# Altium PCB PCB.PcbDoc
Units mm, origin at the board's own origin, x right, y up, seen from the top; angles counter-clockwise.
Board outline 18.92 x 13.97 mm, 2 copper layers (Top Layer, Bottom Layer); 34 components, 22 nets, 94 pads, 27 vias.
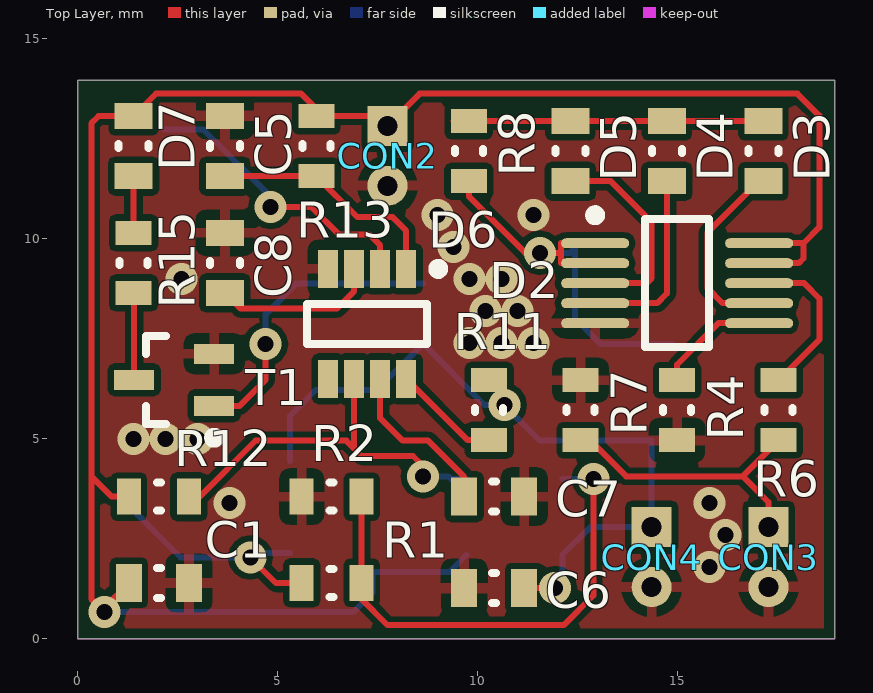
[diagram p0: Top Layer view]
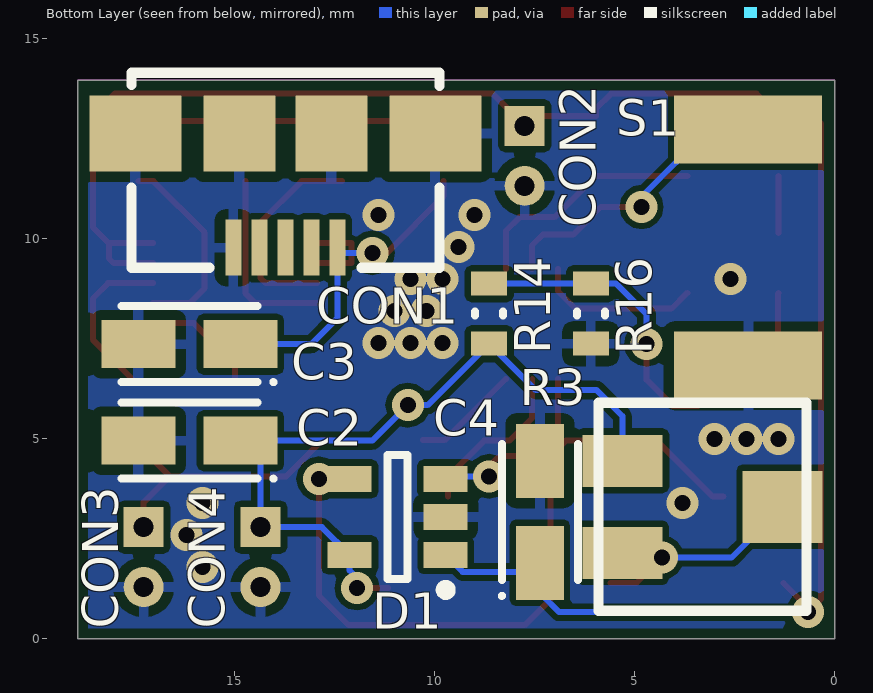
[diagram p1: Bottom Layer view, seen from below]

## Layer stack, top to bottom
Top Solder: solder mask 0.0102, Solder Resist, Dk 3.5
Top Layer: signal copper 0.0356
Dielectric 1: dielectric 0.32, FR-4, Dk 4.8
Bottom Layer: signal copper 0.0356
Bottom Solder: solder mask 0.0102, Solder Resist, Dk 3.5

## Board outline
0,0 18.923,0 18.923,13.97 0,13.97

## Design rules (kind name [scope] priority, off if disabled: settings)
Clearance Clearance_1 [OnLayer('Keep-Out Layer')] p1: gap=0.26 ignorepadtopadclearanceinfootprint=FALSE except(0: Arc-Hole Track-Hole SMDPad-Hole THPad-Hole Via-Hole Fill-Hole Poly-Hole Region-Hole Text-Hole)
Clearance MyClearance [All] p2: gap=0.15 ignorepadtopadclearanceinfootprint=FALSE except(0: Arc-Hole Track-Hole SMDPad-Hole THPad-Hole Via-Hole Fill-Hole Poly-Hole Region-Hole Text-Hole)
Clearance [All] p3: gap=0.254 ignorepadtopadclearanceinfootprint=FALSE except(0: Arc-Hole Track-Hole SMDPad-Hole THPad-Hole Via-Hole Fill-Hole Poly-Hole Region-Hole Text-Hole)
PlaneConnect [All] p1: planeconnectstyle=Direct reliefexpansion=0.508 reliefentries=4 reliefconductorwidth=0.254 reliefairgap=0.254
PolygonConnect PolygonConnect_2 [All vs IsNamedPolygon('Top Layer-GND')] p1: thpad.connectstyle=Relief thpad.reliefconductorwidth=0.254 thpad.reliefentries=4 thpad.polygonreliefangle="90 Angle" thpad.airgapwidth=0.254 smdpad.connectstyle=Relief smdpad.reliefconductorwidth=0.254 smdpad.reliefentries=4 smdpad.polygonreliefangle="90 Angle" smdpad.airgapwidth=0.254 via.connectstyle=Direct via.reliefconductorwidth=0.254 via.reliefentries=4 via.polygonreliefangle="90 Angle" via.airgapwidth=0.254
PolygonConnect PolygonConnect_1 [All vs IsNamedPolygon('Bottom Layer-GND')] p2: thpad.connectstyle=Relief thpad.reliefconductorwidth=0.254 thpad.reliefentries=4 thpad.polygonreliefangle="90 Angle" thpad.airgapwidth=0.254 smdpad.connectstyle=Relief smdpad.reliefconductorwidth=0.254 smdpad.reliefentries=4 smdpad.polygonreliefangle="90 Angle" smdpad.airgapwidth=0.254 via.connectstyle=Direct via.reliefconductorwidth=0.254 via.reliefentries=4 via.polygonreliefangle="90 Angle" via.airgapwidth=0.254
PolygonConnect [All] p3: connectstyle=Relief reliefconductorwidth=0.254 reliefentries=4 polygonreliefangle="90 Angle" airgapwidth=0.254
RoomDefinition Schematic [InComponentClass('Schematic')] p1: confinementstyle=ConfineIn formatcopy=TRUE lockcomponents=FALSE outline 0,0 18.923,0 18.923,13.97 0,13.97
RoutingVias [All] p1: holewidth=0.4 width=0.8 viastyle="Through Hole" minholewidth=0.4 minwidth=0.8 maxholewidth=0.4 maxwidth=0.8
SolderMaskExpansion MyViaSolderMaskExpansion [IsVia] p1: expansion=0 soldermaskfromhole=TRUE
SolderMaskExpansion [All] p2: expansion=0.102
Width [All] p1: maxlimit=0.15 minlimit=0.15 preferedwidth=0.15
29 further rules are at their usual default settings.

## Classes and differential pairs
net class NotGND: +3.7V NetC2_1 NetC3_1 NetC5_1 NetC7_1 NetC8_1 NetCON3_1 NetD1_3 NetD1_4 NetD2_3 NetD2_4 NetD2_6 NetD2_7 NetD2_8 NetD6_2 NetD6_8 NetD7_2 NetR1_2 NetR14_2 NetR15_1

## Components (designator, comment, footprint, x,y, rotation, side; value= is the part's Value field where it differs from the comment)
C1 "Capasitor" CAPC1608X05N 2.032,1.397 r0 top
C2 "Capasitor_POL" CAPMP3216X18N 16.129,4.953 r0 bottom
C3 "Capasitor_POL" CAPMP3216X18N 16.129,7.366 r0 bottom
C4 "Capasitor_POL" CAPMP3216X18N 7.366,3.175 r90 bottom
C5 "Capasitor" CAPC1608X05N 3.683,12.319 r90 top
C6 "Capasitor" CAPC1608X05N 10.414,1.27 r180 top
C7 "Capasitor" CAPC1608X05N 10.414,3.556 r0 top
C8 "Capasitor" CAPC1608X05N 3.683,9.398 r90 top
CON1 "CON?" MicroUSB 13.731,9.079 r0 bottom
CON2 "CON?" HDR1X2_no_body 7.747,12.827 r270 top
CON3 "CON?" HDR1X2_no_body 17.272,2.794 r270 top
CON4 "CON?" HDR1X2_no_body 14.351,2.794 r270 top
D1 "D?" SOT23-5AN 10.922,3.048 r0 bottom
D2 "MCP73833/4" TSSOP50P490-10AN 14.986,8.89 r0 top
D3 "LED" CD1608-0603 17.145,12.192 r270 top
D4 "LED" CD1608-0603 14.732,12.192 r270 top
D5 "LED" CD1608-0603 12.319,12.192 r270 top
D6 "D?" TSOP65P280X100-8N 7.239,7.874 r270 top
D7 "LED" CD1608-0603 1.397,12.319 r270 top
R1 "R?" RESC1608X04N 6.35,1.397 r180 top
R2 "R?" RESC1608X04N 6.35,3.556 r180 top
R3 "R?" TSM4ZJ 3.302,3.302 r270 bottom
R4 "R?" RESC1608X04N 14.986,5.715 r270 top
R6 "R?" RESC1608X04N 17.526,5.715 r270 top
R7 "R?" RESC1608X04N 12.573,5.715 r90 top
R8 "R?" RESC1608X04N 9.779,12.192 r90 top
R11 "R?" RESC1608X04N 10.287,5.715 r90 top
R12 "R?" RESC1608X04N 2.032,3.556 r0 top
R13 "R?" RESC1608X04N 5.969,12.319 r270 top
R14 "R?" RESC1608X04N 8.636,8.128 r90 bottom
R15 "R?" RESC1608X04N 1.397,9.398 r90 top
R16 "R?" RESC1608X04N 6.096,8.128 r270 bottom
S1 "S?" KSS241 2.159,9.779 r90 bottom
T1 "BC817-25" SOT323-3AM 2.413,6.477 r180 top

## Footprints (in the part's own frame and the unit in brackets; to place one, negate y for a bottom-side part, rotate by r counter-clockwise, add the part's x,y. Pads: shape width x height; smd on the part's side, far side on the other; paste and mask are expansions set on the pad)
CAPC1608X05N [mm] "Chip Capacitor, 2-Leads, Body 1.60x0.80mm, IPC Medium Density"
  rect 0.65x0.95 smd: 1(-0.75,0) 2(0.75,0)
  silkscreen extent -0.05,-0.38 0.05,0.38, body extent -0.85,-0.45 0.85,0.45, height 0.5
CAPMP3216X18N [mm] "Molded Capacitor, 2-Leads, Body 3.20x1.60mm, IPC Medium Density"
  rect 1.85x1.2 smd: 1(-1.275,0) 2(1.275,0)
  silkscreen extent -2.15,-0.95 1.7,1, body extent -1.7,-0.9 1.7,0.9, height 1.8
CD1608-0603 [mm]
  rect 0.65x0.95 smd: 1(-0.75,0) 2(0.75,0)
  silkscreen extent -0.05,-0.38 0.05,0.38, body extent -0.8,-0.4 0.8,0.4, height 0.59
HDR1X2_no_body [mm] "No body HDR1X2"
  rect 1x1 hole 0.5: 1(0,0)
  round 1 hole 0.5: 2(1.5,0)
KSS241 [mm] "Subminiature SMT Side Actuated"
  rect 1.7x3.7 smd: 1(-2.95,0) 2(2.95,0)
  body extent -2.95,-2.65 2.95,1.95, height 1.7
MicroUSB [mm] "AMPHENOL FCI  10104111-0001LF, Micro USB type AB, USB 2.0"
  rect 0.4x1.4 smd: 1(-1.3,-0.7) 2(-0.65,-0.7) 3(0,-0.7) 4(0.65,-0.7) 5(1.3,-0.7)
  rect 2.3x1.9 smd: 5(-3.75,-3.55) 5(3.75,-3.55)
  rect 1.8x1.9 smd: 5(-1.15,-3.55) 5(1.15,-3.55)
  silkscreen extent -3.85,-5.08 3.85,-0.2, body extent -3.7,-4.88 3.7,-0.35, height 3.07
RESC1608X04N [mm] "Chip Resistor, 2-Leads, Body 1.60x0.80mm, IPC Medium Density"
  rect 0.6x0.9 smd: 1(-0.75,0) 2(0.75,0)
  silkscreen extent -0.05,-0.35 0.05,0.35, body extent -0.85,-0.45 0.85,0.45, height 0.4
SOT23-5AN [mm]
  rect 1.1x0.65 smd: 1(-1.2,0.95) 2(-1.2,0) 3(-1.2,-0.95) 4(1.2,-0.95) 5(1.2,0.95)
  silkscreen extent -1.32,-1.55 0.25,1.95, body extent -1.5,-1.52 1.5,1.53, height 1.55
SOT323-3AM [mm] "SOT323, 3-Leads, Body 2.0x1.3mm, Pitch 0.65mm, Lead Span 2.1mm, IPC Low Density"
  rect 1x0.5 smd: 1(-1,0.65) 2(-1,-0.65) 3(1,0)
  silkscreen extent -1.13,-1.1 0.7,1.57, body extent -1.1,-1 1,1, height 1.07
TSM4ZJ [mm] "5 mm Square Surface Mount Miniature Trimmers Multi-Turn  Cermet Sealed"
  rect 1.3x2 smd: 1(1.15,-2) 3(-1.15,-2)
  rect 1.8x2 smd: 2(0,2)
  silkscreen extent -2.6,-2.6 2.6,2.6, body extent -2.6,-2.6 2.6,2.6, height 3.5
TSOP65P280X100-8N [mm] "TSOP, 8-Leads, Body 2.90x1.63mm, Pitch 0.65mm, IPC Medium Density"
  rect 0.95x0.5 smd: 1(-1.375,0.975) 2(-1.375,0.325) 3(-1.375,-0.325) 4(-1.375,-0.975) 5(1.375,-0.975) 6(1.375,-0.325) 7(1.375,0.325) 8(1.375,0.975)
  silkscreen extent -1.5,-1.5 0.5,1.9, body extent -0.9,-1.5 0.9,1.5, height 1
TSSOP50P490-10AN [mm]
  oval 1.7x0.25 smd: 1(-2.05,1) 2(-2.05,0.5) 3(-2.05,0) 4(-2.05,-0.5) 5(-2.05,-1) 6(2.05,-1) 7(2.05,-0.5) 8(2.05,0) 9(2.05,0.5) 10(2.05,1)
  silkscreen extent -2.17,-1.6 0.8,1.82, body extent -2.45,-1.47 2.45,1.53, height 1.05

## Part data
C2 C3 C4: Manufacturer=KEMET, ManufacturerPN=T491A475K006AT, Capasitance=4.7µF, Farnell=2321209
C6: Manufacturer=WALSIN, ManufacturerPN=0603B103K101CT, Capasitance=0.01uF, Farnell=2496825
C7: Manufacturer=WALSIN, ManufacturerPN=0603X105K100CT, Capasitance=0.033uF, Farnell=2496916
CON1: library part MicroUSB, Manufacturer="AMPHENOL FCI", PartNumber=10104111-0001LF, Farnell=2293755
CON2 CON3 CON4: library part HDR1X2
  CON3: Thermistor="MF52A2103J3470 10K"
D1: library part TPS76901, PartNumber=TPS76901DBVR, Farnell=2112624
D6: library part LTC2654-2, Farnell=1663887, TexasInstruments=LTC2954CTS8-2#TRMPBF
R1: library part Resistor, Resistance=0/100K
R2 R11 R12: library part Resistor, Resistance=100K
R3: library part Resistor_ADJ, Manufacturer=VISHAY, PartNumber=TSM4ZJ203KR10, Resistance=20K, Farnell=8792500
R4: library part Resistor, Resistance=22K
R6 R8 R13: library part Resistor, Resistance=1K33
R7: library part Resistor, Resistance=20M
R14: library part Resistor, Resistance=5K6
R15: library part Resistor, Resistance=4K7
R16: library part Resistor, Resistance=33K
S1: library part PushButton, Manufacturer="C and K components", ManufacturerPN=KSS243GLFG, Farnell=2320069
T1: library part "NPN SMD"
C1: Capasitance=0.1µF
C5 C8: Capasitance=0.1uF

## Via types
v1: diameter 0.8, hole 0.4, Top Layer to Bottom Layer, tented both sides, 18 vias
v2: diameter 0.8, hole 0.4, Top Layer to Bottom Layer, 9 vias

## Nets (pads, with @x,y where several pads share a name; then routed paths per layer and width w, separated by ;. In a path a pad name is that pad's centre, name@x,y a point inside that pad or via, vN(x,y) a via of type N, cw(c..) or ccw(c..) an arc to the next point about the centre after c; other vN are vias at no path point)
+3.7V: C1.1 C4.1 CON2.1 D1.1 D2.9 D2.10 D7.1 R12.1 R13.1 | length 50.1
  Top Layer w0.15: C1.1 0.665,0.78 v2(0.665,0.665) 0.34,0.99 0.34,4.064 ; R12.1@1.282,3.81 1.028,3.556 0.848,3.556 0.34,4.064 ; D2.9 18.026,9.39 18.145,9.509 18.145,9.89 ; D2.10 18.145,9.89 ; 0.34,4.064 0.34,12.889 0.52,13.069 D7.1 1.958,13.63 5.588,13.63 5.969,13.249 R13.1 7.505,13.069 CON2.1 8.55,13.63 17.993,13.63 18.542,13.081 18.542,10.287 18.145,9.89
  Bottom Layer w0.15: v2(0.665,0.665) 6.888,0.665 7.366,1.143 7.366,1.675 9.299,1.675 D1.1
GND: C1.2 C2.2 C3.2 C4.2 C5.2 C6.2 C7.2 C8.2 CON1.5 CON2.2 CON3.2 CON4.2 D1.2 D2.5 D6.4 R2.2 R4.2 R7.2 R16.2 S1.1 T1.2
  other v1: 15.8,1.8 16.2,2.6 3.8,3.4 15.8,3.4 1.4,5 2.2,5 3,5 9.8,7.4 10.6,7.4 11.4,7.4 10.2,8.2 11,8.2 2.6,9 9.8,9 10.6,9 9.4,9.8 9,10.6 11.4,10.6
NetC2_1: C2.1 C6.1 CON4.1 D1.5 R3.3 R11.2 R14.1 | length 18.3
  Top Layer w0.15: C6.1 v2(11.938,1.27)
  Bottom Layer w0.15: R3.3 5.302,5.568 5.957,6.223 7.481,6.223 R14.1 10.172,5.842 v2(10.668,5.842) 11.557,4.953 14.351,4.953 CON4.1 12.818,2.794 D1.5 12.122,1.708 11.938,1.524 v2(11.938,1.27)
NetC3_1: C3.1 CON1.1 D2.1 D2.2 R8.1 | length 10.9
  Top Layer w0.15: R8.1 9.779,11.061 11.188,9.652 v2(11.557,9.652) 12.081,9.652 ; D2.2 12.081,9.39 12.081,9.652 ; D2.1 12.081,9.89 12.081,9.652
  Bottom Layer w0.15: v2(11.557,9.652) 12.304,9.652 CON1.1 12.431,8.016 13.081,7.366 C3.1
NetC5_1: C5.1 D6.1 R13.2 | length 6
  Top Layer w0.15: C5.1 R13.2 6.997,10.541 7.874,10.541 8.214,10.201 D6.1
NetC7_1: C7.1 D6.7 | length 4.2
  Top Layer w0.15: D6.7 7.564,5.517 8.128,4.953 8.763,4.953 9.664,4.052 C7.1
NetC8_1: C8.1 D6.3 | length 4.1
  Top Layer w0.15: C8.1 4.076,8.255 6.477,8.255 6.914,8.692 D6.3
NetCON3_1: CON3.1 R6.2 R7.1 | length 7.2
  Top Layer w0.15: R7.1 12.81,4.965 13.711,4.064 16.625,4.064 ; CON3.1 17.272,3.417 16.625,4.064 ; R6.2 16.625,4.064
NetD1_3: D1.3 D6.6 R12.2 | length 10.1
  Top Layer w0.15: R12.2 3.048,3.556 4.445,4.953 6.716,4.953 6.914,4.755 ; D6.6 6.914,4.755 ; v2@8.636,3.81 v2(8.636,4.064) 8.636,4.318 8.382,4.572 7.097,4.572 6.914,4.755
  Bottom Layer w0.15: v2(8.636,4.064) 9.266,4.064 9.332,3.998 D1.3
NetD1_4: D1.4 R1.1 R2.1 | length 12.6
  Top Layer w0.15: R2.1 R1.1 7.1,0.987 7.747,0.34 12.151,0.34 12.893,1.082 v2(12.893,3.998)
  Bottom Layer w0.15: D1.4 v2(12.893,3.998)
NetD2_3: D2.3 D5.2 | length 5.3
  Top Layer w0.15: D5.2 13.323,11.442 14.351,10.414 14.351,9.017 14.224,8.89 D2.3
NetD2_4: D2.4 D4.2 | length 4.7
  Top Layer w0.15: D2.4 14.486,8.39 14.732,8.636 D4.2
NetD2_6: D2.6 R4.1 | length 2.9
  Top Layer w0.15: R4.1 14.986,6.858 16.018,7.89 D2.6
NetD2_7: D2.7 D3.2 | length 5
  Top Layer w0.15: D2.7 16.121,8.39 15.748,8.763 15.748,10.16 17.03,11.442 D3.2 D3.2@17.399,11.442
NetD2_8: D2.8 R6.1 | length 4.1
  Top Layer w0.15: D2.8 18.161,8.89 18.542,8.509 18.542,7.481 R6.1
NetD3_1: D3.1 D4.1 D5.1 R8.2 | length 8
  Top Layer w0.15: R8.2@9.398,12.942 R8.2 D5.1 D4.1 D3.1 D3.1@17.399,12.942
NetD6_2: D6.2 S1.2 | length 7.3
  Top Layer w0.15: v2(4.826,10.795) 5.842,10.795 6.523,10.114 7.285,10.114 7.564,9.835 D6.2
  Bottom Layer w0.15: S1.2 3.146,12.729 4.826,11.049 v2(4.826,10.795)
NetD6_8: D6.8 R11.1 | length 2.7
  Top Layer w0.15: D6.8 9.748,4.965 R11.1
NetD7_2: D7.2 R15.2 | length 1.4
  Top Layer w0.15: R15.2 D7.2
NetR1_2: R1.2 R3.1 R3.2 | length 6.1
  Top Layer w0.15: v2(4.318,2.032) 4.953,1.397 R1.2
  Bottom Layer w0.15: R3.2 2.572,2.032 v2(4.318,2.032) 4.572,2.032 4.692,2.152 R3.1
NetR14_2: R14.2 R16.1 T1.1 | length 7.4
  Top Layer w0.15: T1.1 4.049,5.827 4.699,6.477 v2(4.699,7.366)
  Bottom Layer w0.15: v2(4.699,7.366) 4.699,8.116 5.461,8.878 R16.1 R14.2
NetR15_1: R15.1 T1.3 | length 2.2
  Top Layer w0.15: R15.1 1.413,8.632 T1.3
pads on no net: CON1.2 CON1.3 CON1.4 D6.5

## Polygon pours and split planes (outlines as drawn)
GND on Top Layer "Top Layer-GND" (solid, remove dead copper, pour order 0): 0,0 18.923,0 18.923,13.97 0,13.97
GND on Bottom Layer "Bottom Layer-GND" (solid, remove dead copper, pour order 1): 0,0 18.923,0 18.923,13.97 0,13.97

## Keep-outs
Keep-Out Layer:
  the board outline again, w0.01